# Altium PCB ap-pam-v3_2.PcbDoc
Units mm, origin at the board's own origin, x right, y up, seen from the top; angles counter-clockwise.
Board outline 190.5 x 50.8 mm, 2 copper layers (Top Layer, Bottom Layer), stack 0.579 mm thick; 8 components, 4 nets, 92 pads, 1167 vias.
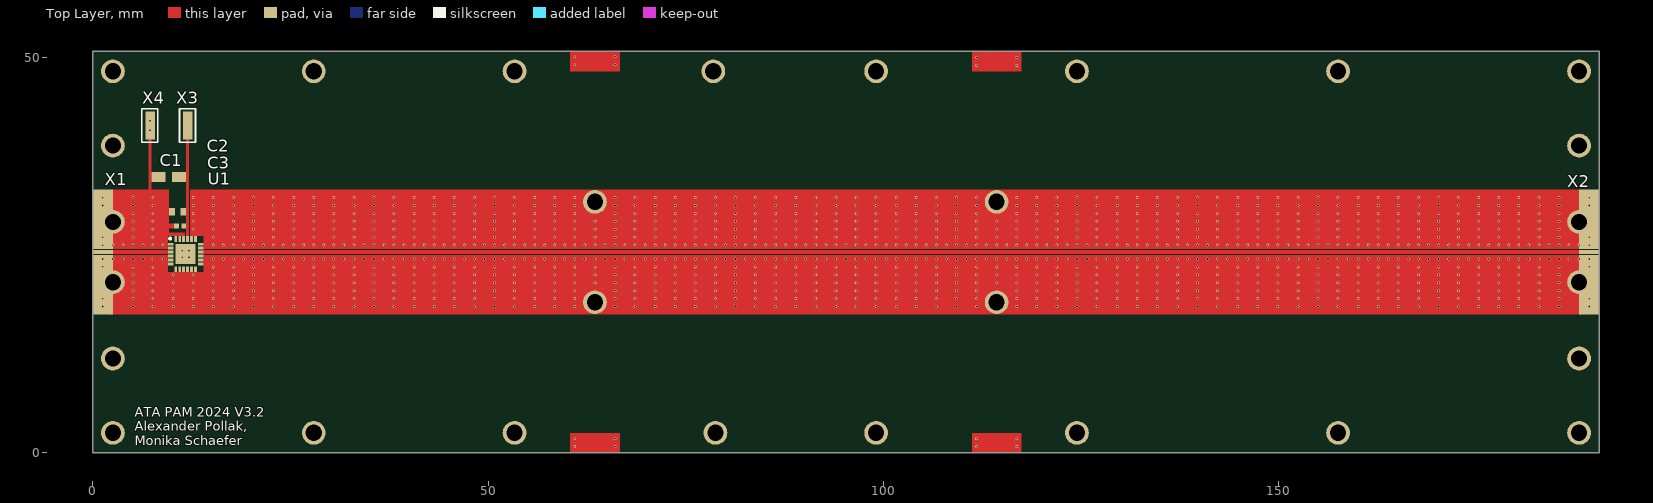
[diagram p0: Top Layer view]
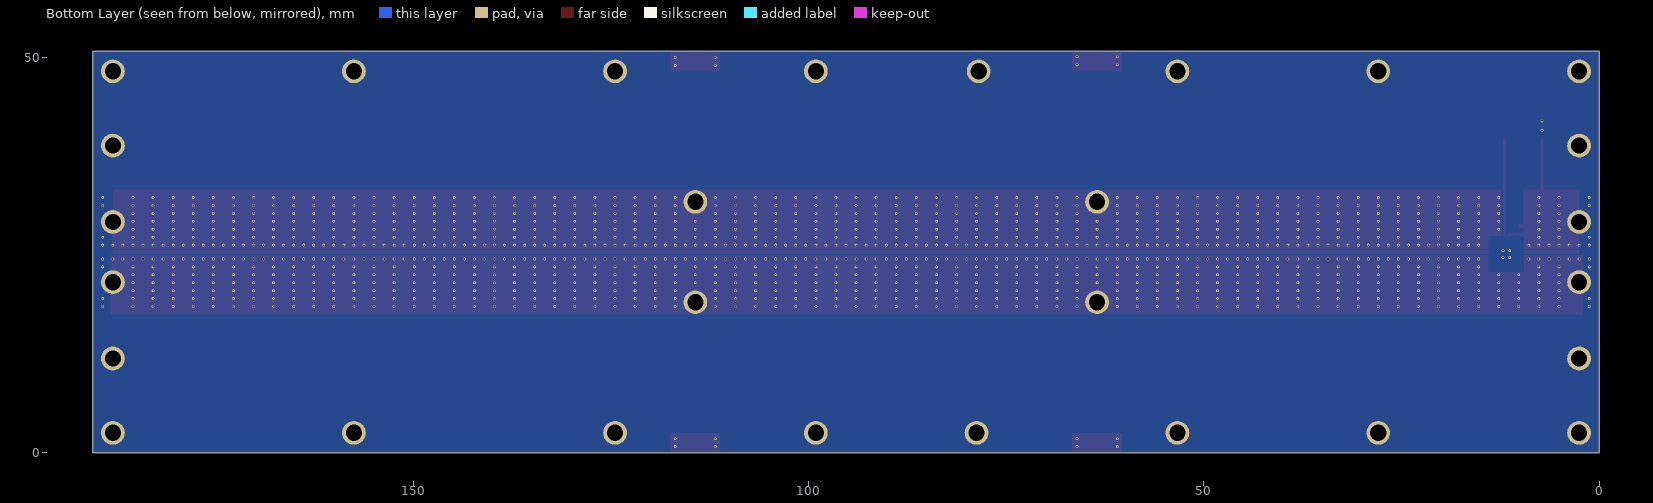
[diagram p1: Bottom Layer view, seen from below]
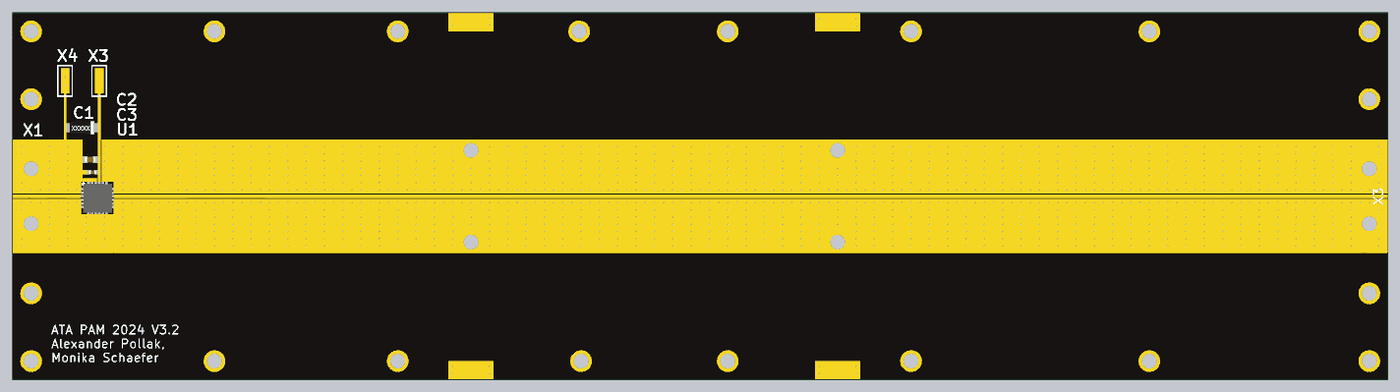
[diagram p2: 3D render of the assembled board from above, using the file's embedded part models]

## Layer stack, top to bottom
Top Layer: signal copper 0.0356
Dielectric 1: dielectric 0.508, Rogers 4350B, Dk 3.48
Bottom Layer: signal copper 0.0356

## Board outline
0,0 190.5,0 190.5,50.8 0,50.8

## Design rules (kind name [scope] priority, off if disabled: settings)
Clearance [All] p1: gap=0.1 ignorepadtopadclearanceinfootprint=FALSE
HoleSize [All] p1: absolutevalues=TRUE maxlimit=2.54 minlimit=0.2 maxpercent=80.000 minpercent=20.000
MinimumSolderMaskSliver [All] p1: minsoldermaskwidth=0.1
PolygonConnect [All] p1: connectstyle=Direct reliefconductorwidth=0.254 reliefentries=4 polygonreliefangle="90 Angle" airgapwidth=0.254
RoutingVias [All] p1: holewidth=0.711 width=1.27 viastyle="Through Hole" minholewidth=0.2 minwidth=0.35 maxholewidth=0.711 maxwidth=1.27
SilkToSolderMaskClearance [IsPad] p1: minsilkscreentomaskgap=0.15 clearancetoexposedcopper=TRUE
SolderMaskExpansion [All] p1: expansion=0.102 istentingtop=FALSE
SupplyNets "Schematic Supply Nets" [InNet('GND')] p1: voltage=0.000
Width [All] p1: maxlimit=0.254 minlimit=0.254 preferedwidth=0.254
27 further rules are at their usual default settings.

## Components (designator, comment, footprint, x,y, rotation, side; value= is the part's Value field where it differs from the comment)
C1 "4.7 uF" C4_7UF 9.611,34.908 r180 top value=4.7uF
C2 "1000 pF" C1000PF 10.736,30.49 r0 top value=1nF
C3 "100 pF" C100PF 11.051,28.71 r0 top
U1 "MML098Q4A" MML098Q4A 11.735,25.15 r0 top
X1 "CPW Solder Pad" "CPW EDGE CONNECTOR" 1.27,25.4 r90 top (schematic designator X4)
X2 "CPW Solder Pad" "CPW EDGE CONNECTOR" 189.23,25.4 r90 top (schematic designator X3)
X3 "Solder Pad" "SOLDER PAD" 11.985,41.398 r0 top
X4 "Solder Pad" "SOLDER PAD" 7.236,41.398 r0 top

## Footprints (in the part's own frame and the unit in brackets; to place one, negate y for a bottom-side part, rotate by r counter-clockwise, add the part's x,y. Pads: shape width x height; smd on the part's side, far side on the other; paste and mask are expansions set on the pad)
C4_7UF [mm]
  rect 1.8x1.25 smd: 1(-1.3,0) 2(1.3,0)
  body extent -1.7,-0.95 1.7,0.95, height 1.84
C100PF [mm]
  rect 0.6x0.62 smd: 1(-0.46,0) 2(0.461,0)
  body extent -0.5,-0.25 0.5,0.25, height 0.55
C1000PF [mm]
  rect 0.75x0.94 smd: 1(-0.7,0) 2(0.7,0)
  body extent -0.8,-0.4 0.8,0.4, height 0.9
"CPW EDGE CONNECTOR" [mm]
  rect 0.538x2.54 smd paste-2539.97: 1(0,0)
  rect 7.5x2.54 smd paste-2539.97: 2(-4.133,0) 3(4.133,0)
MML098Q4A [mm]
  rect 0.7x0.35 smd: 1(-1.9,1.25) 2(-1.9,0.75) 3(-1.9,0.25) 4(-1.9,-0.25) 5(-1.9,-0.75) 6(-1.9,-1.25) 13(1.9,-1.25) 14(1.9,-0.75) 15(1.9,-0.25) 16(1.9,0.25) 17(1.9,0.75) 18(1.9,1.25)
  rect 0.7x0.35 on Top Paste: 1(-1.9,1.25) 2(-1.9,0.75) 3(-1.9,0.25) 4(-1.9,-0.25) 5(-1.9,-0.75) 6(-1.9,-1.25) 13(1.9,-1.25) 14(1.9,-0.75) 15(1.9,-0.25) 16(1.9,0.25) 17(1.9,0.75) 18(1.9,1.25)
  rect 0.35x0.7 smd: 7(-1.25,-1.9) 8(-0.75,-1.9) 9(-0.25,-1.9) 10(0.25,-1.9) 11(0.75,-1.9) 12(1.25,-1.9) 19(1.25,1.9) 20(0.75,1.9) 21(0.25,1.9) 22(-0.25,1.9) 23(-0.75,1.9) 24(-1.25,1.9)
  rect 0.35x0.7 on Top Paste: 7(-1.25,-1.9) 8(-0.75,-1.9) 9(-0.25,-1.9) 10(0.25,-1.9) 11(0.75,-1.9) 12(1.25,-1.9) 19(1.25,1.9) 20(0.75,1.9) 21(0.25,1.9) 22(-0.25,1.9) 23(-0.75,1.9) 24(-1.25,1.9)
  rect 2.55x2.55 smd: 25(0,0)
  rect 2.5x2.5 on Top Paste: 25(0,0)
  silkscreen extent -2.07,1.83 -1.83,2.07, body extent -2.05,-2.05 2.05,2.05, height 1.05
"SOLDER PAD" [mm]
  rect 1.2x3.5 smd paste-2539.97: 1(0,0)
  silkscreen extent -1.02,-2.12 1,2.12

## Part data
C1: library part TH3A475K010C2900, "Tantalum Capacitor, Polarized, Tantalum (dry/solid), 10V, 10% +Tol, 10% -Tol, 4.7uF, Surface Mount, 1306", Capacitor Type=Tantalum, Case/Package=1206, ESR (Equivalent Series Resistance)=2.9R, Leakage Current=500nA, Manufacturer="Vishay Sprague", Max Operating Temperature=150°C, Min Operating Temperature=-55°C, Package Shape=Rectangular, Package Style=SMTMeter, Rated DC Voltage (URdc)=10V, Ripple Current=160mA, Supplier Part Number=4924098, Tolerance  (fill in as +-)=10%, Category="Tantalum Capacitors", ComponentLink1Description=https://datasheet.ciiva.com:443/pdfs/VipMasterIC/IC/VISH/VISH-S-A0010085390/VISH-S-A0010085390-1.pdf?src-supplier=IHS+Markit, ComponentLink1URL=https://datasheet.ciiva.com:443/pdfs/VipMasterIC/IC/VISH/VISH-S-A0010085390/VISH-S-A0010085390-1.pdf?src-supplier=IHS+Markit, ComponentLink2Description=https://datasheet.ciiva.com/268/th3-268785.pdf?src-supplier=Digikey, ComponentLink2URL=https://datasheet.ciiva.com/268/th3-268785.pdf?src-supplier=Digikey, ComponentLink3Description=https://datasheet.ciiva.com/16360/th3-16360891.pdf?src-supplier=Future+Electronics, ComponentLink3URL=https://datasheet.ciiva.com/16360/th3-16360891.pdf?src-supplier=Future+Electronics, Dielectric Material=Tantalum, Height=1.6mm, JESD-609 Code=e3, Length=3.2mm, Manufacturer Part Number=TH3A475K010C2900, Mounting Technology="Surface Mount", Packaging="Tape and Reel", Pins=2, Polarity=Polarized, Pricing="2000=0.178, 4000=0.175, 6000=0.173, 8000=0.171, 10000=0.166 (USD)", Reach SVHC Compliant=Yes, Reference Standard=AEC-Q200, RoHS=Yes, RoHS Compliant=Yes, Stock=2000, Supplier="Future Electronics", Tan Delta=0.06, Terminal Finish=Tin, Termination="J BEND", Tolerance (fill in as +-)=10%, Width=1.6mm
C2: library part GCM1885C1H102FA16D, "Ceramic Capacitor, Multilayer, Ceramic, 50V, 1% +Tol, 1% -Tol, C0G, 30ppm/Cel TC, 0.001uF, Surface Mount, 0603", Capacitor Type=Ceramic, Case/Package=0603, Manufacturer=Murata, Max Operating Temperature=125°C, Min Operating Temperature=-55°C, Package Shape=Rectangular, Rated DC Voltage (URdc)=50V, Supplier Part Number=81-GCM1885C1H102FA6D, Temperature Characteristics Code=C0G, Tolerance  (fill in as +-)=1%, Category="Ceramic Capacitors", ComponentLink1Description=https://datasheet.ciiva.com:443/pdfs/VipMasterIC/IC/MURE/MURE-S-A0004370842/MURE-S-A0004372260-1.pdf?src-supplier=IHS+Markit, ComponentLink1URL=https://datasheet.ciiva.com:443/pdfs/VipMasterIC/IC/MURE/MURE-S-A0004370842/MURE-S-A0004372260-1.pdf?src-supplier=IHS+Markit, Dielectric Material=Ceramic, Manufacturer Part Number=GCM1885C1H102FA16D, Mounting Technology="Surface Mount", Multilayer=Yes, Packaging="Tape and Reel", Pins=2, Pricing="1=0.35, 10=0.229, 50=0.229, 100=0.138, 1000=0.092, 10000=0.074 (USD)", Reach SVHC Compliant=Yes, Reference Standard=AEC-Q200, RoHS=Yes, RoHS Compliant=Yes, Stock=27229, Supplier=Mouser, Termination=Wraparound, Tolerance (fill in as +-)=1%
C3: library part GRM1555C2A101FA01D, "Multilayer Ceramic Capacitors MLCC - SMD/SMT 100 pF 100 VDC 1% 0402 C0G (NP0)", Manufacturer=Murata, Supplier Part Number=81-GRM1555C2A11FA1D, Manufacturer Part Number=GRM1555C2A101FA01D, Pricing="1=0.18, 10=0.119, 50=0.119, 100=0.06, 1000=0.039, 10000=0.035 (USD)", RoHS=No, Stock=21646, Supplier=Mouser
U1: "Low Noise Amplifier / Low current consumption / Low noise figure / Pb-free RoHS compliant QFN package / Ultra wideband performance / Positive bias / Ready for Space Qualification", Current (mA)=55, Frequency (GHz)=0.10-20.00, Voltage (VDC)=5.0, Gain (dB)=23.00, Noise Figure (dB)=2.2, Output P1dB (dBm)=12.00, Part Number=MML098Q4A
X1 X2: library part "RF  CPW Solder Pad", "Solder pad for RF Coplanar Waveguide Rogers 4350B Thickness 0.020\" Copper 1oz"
X3 X4: "Pad to solder wires to"

## Free pads (board coordinates)
  round 3 hole 2.05 mask-2539.97: 1(2.54,2.54) 2(27.94,2.54) 3(53.34,2.54) 4(78.74,2.54) 5(99.06,2.54) 6(124.46,2.54) 7(157.48,2.54) 8(187.96,2.54) 9(187.96,48.26) 10(157.48,48.26) 11(124.46,48.26) 12(99.06,48.26) 13(78.47,48.26) 14(53.34,48.26) 15(27.94,48.26) 16(2.54,48.26) 17(2.54,38.862) 18(2.54,29.21) 19(2.54,21.59) 20(2.54,11.938) 21(187.96,38.862) 22(187.96,29.21) 23(187.96,21.59) 24(187.96,11.938) 25(63.5,31.75) 26(114.3,31.75) 27(114.3,19.05) 28(63.5,19.05)

## Via types
v1: diameter 0.35, hole 0.2, Top Layer to Bottom Layer, 1167 vias

## Nets (pads, with @x,y where several pads share a name; then routed paths per layer and width w, separated by ;. In a path a pad name is that pad's centre, name@x,y a point inside that pad or via, vN(x,y) a via of type N, cw(c..) or ccw(c..) an arc to the next point about the centre after c; other vN are vias at no path point)
+5V: C1.1 C2.2 C3.2 U1.21@11.985,27.05 X3.1
GND: C1.2 C2.1 C3.1 pad.1 pad.2 pad.3 pad.4 pad.5 pad.6 pad.7 pad.8 pad.9 pad.10 pad.11 pad.12 pad.13 pad.14 pad.15 pad.16 pad.17 pad.18 pad.19 pad.20 pad.21 pad.22 pad.23 pad.24 pad.25 pad.26 pad.27 pad.28 U1.1@9.835,26.4 U1.2@9.835,25.9 U1.4@9.835,24.9 U1.5@9.835,24.4 U1.6@9.835,23.9 U1.7@10.485,23.25 U1.8@10.985,23.25 U1.9@11.485,23.25 U1.10@11.985,23.25 U1.11@12.485,23.25 U1.12@12.985,23.25 U1.13@13.635,23.9 U1.14@13.635,24.4 U1.15@13.635,24.9 U1.17@13.635,25.9 U1.18@13.635,26.4 U1.19@12.985,27.05 U1.20@12.485,27.05 U1.22@11.485,27.05 U1.23@10.985,27.05 U1.24@10.485,27.05 U1.25@11.735,25.15 X1.2 X1.3 X2.2 X2.3 X4.1 | length 0.4
  Top Layer w0.254: 22.86,30.6 22.925,30.665 22.925,30.975 22.9,30.95
  other v1: 60.96,0.8 66.04,0.8 111.76,0.8 116.84,0.8 60.96,1.8 66.04,1.8 111.76,1.8 116.84,1.8 1.27,18.517 5.08,18.517 7.62,18.517 10.16,18.517 12.7,18.517 15.24,18.517 17.78,18.517 20.32,18.517 22.86,18.517 25.4,18.517 27.94,18.517 30.48,18.517 33.02,18.517 35.56,18.517 38.1,18.517 40.64,18.517 43.18,18.517 45.72,18.517 48.26,18.517 50.8,18.517 53.34,18.517 55.88,18.517 58.42,18.517 60.96,18.517 66.04,18.517 68.58,18.517 71.12,18.517 73.66,18.517 76.2,18.517 78.74,18.517 81.28,18.517 83.82,18.517 86.36,18.517 88.9,18.517 91.44,18.517 93.98,18.517 96.52,18.517 99.06,18.517 101.6,18.517 104.14,18.517 106.68,18.517 109.22,18.517 111.76,18.517 116.84,18.517 119.38,18.517 121.92,18.517 124.46,18.517 127,18.517 129.54,18.517 132.08,18.517 134.62,18.517 137.16,18.517 139.7,18.517 142.24,18.517 144.78,18.517 147.32,18.517 149.86,18.517 152.4,18.517 154.94,18.517 157.48,18.517 160.02,18.517 162.56,18.517 165.1,18.517 167.64,18.517 170.18,18.517 172.72,18.517 175.26,18.517 177.8,18.517 180.34,18.517 182.88,18.517 185.42,18.517 189.23,18.517 1.27,19.517 5.08,19.517 7.62,19.517 10.16,19.517 12.7,19.517 15.24,19.517 17.78,19.517 20.32,19.517 22.86,19.517 25.4,19.517 27.94,19.517 30.48,19.517 33.02,19.517 35.56,19.517 38.1,19.517 40.64,19.517 43.18,19.517 45.72,19.517 48.26,19.517 50.8,19.517 53.34,19.517 55.88,19.517 58.42,19.517 60.96,19.517 66.04,19.517 68.58,19.517 71.12,19.517 73.66,19.517 76.2,19.517 78.74,19.517 81.28,19.517 83.82,19.517 86.36,19.517 88.9,19.517 91.44,19.517 93.98,19.517 96.52,19.517 99.06,19.517 101.6,19.517 104.14,19.517 106.68,19.517 109.22,19.517 111.76,19.517 116.84,19.517 119.38,19.517 121.92,19.517 124.46,19.517 127,19.517 129.54,19.517 132.08,19.517 134.62,19.517 137.16,19.517 139.7,19.517 142.24,19.517 144.78,19.517 147.32,19.517 149.86,19.517 152.4,19.517 154.94,19.517 157.48,19.517 160.02,19.517 162.56,19.517 165.1,19.517 167.64,19.517 170.18,19.517 172.72,19.517 175.26,19.517 177.8,19.517 180.34,19.517 182.88,19.517 185.42,19.517 189.23,19.517 5.08,20.517 7.62,20.517 10.16,20.517 12.7,20.517 15.24,20.517 17.78,20.517 20.32,20.517 22.86,20.517 25.4,20.517 27.94,20.517 30.48,20.517 33.02,20.517 35.56,20.517 38.1,20.517 40.64,20.517 43.18,20.517 45.72,20.517 48.26,20.517 50.8,20.517 53.34,20.517 55.88,20.517 58.42,20.517 60.96,20.517 66.04,20.517 68.58,20.517 71.12,20.517 73.66,20.517 76.2,20.517 78.74,20.517 81.28,20.517 83.82,20.517 86.36,20.517 88.9,20.517 91.44,20.517 93.98,20.517 96.52,20.517 99.06,20.517 101.6,20.517 104.14,20.517 106.68,20.517 109.22,20.517 111.76,20.517 116.84,20.517 119.38,20.517 121.92,20.517 124.46,20.517 127,20.517 129.54,20.517 132.08,20.517 134.62,20.517 137.16,20.517 139.7,20.517 142.24,20.517 144.78,20.517 147.32,20.517 149.86,20.517 152.4,20.517 154.94,20.517 157.48,20.517 160.02,20.517 162.56,20.517 165.1,20.517 167.64,20.517 170.18,20.517 172.72,20.517 175.26,20.517 177.8,20.517 180.34,20.517 182.88,20.517 185.42,20.517 5.08,21.517 7.62,21.517 10.16,21.517 12.7,21.517 15.24,21.517 17.78,21.517 20.32,21.517 22.86,21.517 25.4,21.517 27.94,21.517 30.48,21.517 33.02,21.517 35.56,21.517 38.1,21.517 40.64,21.517 43.18,21.517 45.72,21.517 48.26,21.517 50.8,21.517 53.34,21.517 55.88,21.517 58.42,21.517 60.96,21.517 63.5,21.517 66.04,21.517 68.58,21.517 71.12,21.517 73.66,21.517 76.2,21.517 78.74,21.517 81.28,21.517 83.82,21.517 86.36,21.517 88.9,21.517 91.44,21.517 93.98,21.517 96.52,21.517 99.06,21.517 101.6,21.517 104.14,21.517 106.68,21.517 109.22,21.517 111.76,21.517 114.3,21.517 116.84,21.517 119.38,21.517 121.92,21.517 124.46,21.517 127,21.517 129.54,21.517 132.08,21.517 134.62,21.517 137.16,21.517 139.7,21.517 142.24,21.517 144.78,21.517 147.32,21.517 149.86,21.517 152.4,21.517 154.94,21.517 157.48,21.517 160.02,21.517 162.56,21.517 165.1,21.517 167.64,21.517 170.18,21.517 172.72,21.517 175.26,21.517 177.8,21.517 180.34,21.517 182.88,21.517 185.42,21.517 5.08,22.517 7.62,22.517 10.16,22.517 12.7,22.517 15.24,22.517 17.78,22.517 20.32,22.517 22.86,22.517 25.4,22.517 27.94,22.517 30.48,22.517 33.02,22.517 35.56,22.517 38.1,22.517 40.64,22.517 43.18,22.517 45.72,22.517 48.26,22.517 50.8,22.517 53.34,22.517 55.88,22.517 58.42,22.517 60.96,22.517 63.5,22.517 66.04,22.517 68.58,22.517 71.12,22.517 73.66,22.517 76.2,22.517 78.74,22.517 81.28,22.517 83.82,22.517 86.36,22.517 88.9,22.517 91.44,22.517 93.98,22.517 96.52,22.517 99.06,22.517 101.6,22.517 104.14,22.517 106.68,22.517 109.22,22.517 111.76,22.517 114.3,22.517 116.84,22.517 119.38,22.517 121.92,22.517 124.46,22.517 127,22.517 129.54,22.517 132.08,22.517 134.62,22.517 137.16,22.517 139.7,22.517 142.24,22.517 144.78,22.517 147.32,22.517 149.86,22.517 152.4,22.517 154.94,22.517 157.48,22.517 160.02,22.517 162.56,22.517 165.1,22.517 167.64,22.517 170.18,22.517 172.72,22.517 175.26,22.517 177.8,22.517 180.34,22.517 182.88,22.517 185.42,22.517 1.27,23.517 5.08,23.517 7.62,23.517 15.24,23.517 17.78,23.517 20.32,23.517 22.86,23.517 25.4,23.517 27.94,23.517 30.48,23.517 33.02,23.517 35.56,23.517 38.1,23.517 40.64,23.517 43.18,23.517 45.72,23.517 48.26,23.517 50.8,23.517 53.34,23.517 55.88,23.517 58.42,23.517 60.96,23.517 63.5,23.517 66.04,23.517 68.58,23.517 71.12,23.517 73.66,23.517 76.2,23.517 78.74,23.517 81.28,23.517 83.82,23.517 86.36,23.517 88.9,23.517 91.44,23.517 93.98,23.517 96.52,23.517 99.06,23.517 101.6,23.517 104.14,23.517 106.68,23.517 109.22,23.517 111.76,23.517 114.3,23.517 116.84,23.517 119.38,23.517 121.92,23.517 124.46,23.517 127,23.517 129.54,23.517 132.08,23.517 134.62,23.517 137.16,23.517 139.7,23.517 142.24,23.517 144.78,23.517 147.32,23.517 149.86,23.517 152.4,23.517 154.94,23.517 157.48,23.517 160.02,23.517 162.56,23.517 165.1,23.517 167.64,23.517 170.18,23.517 172.72,23.517 175.26,23.517 177.8,23.517 180.34,23.517 182.88,23.517 185.42,23.517 189.23,23.517 1.27,24.517 2.54,24.517 3.81,24.517 5.08,24.517 6.35,24.517 7.62,24.517 8.89,24.517 15.24,24.517 16.51,24.517 17.78,24.517 19.05,24.517 20.32,24.517 21.59,24.517 22.86,24.517 24.13,24.517 25.4,24.517 26.67,24.517 27.94,24.517 29.21,24.517 30.48,24.517 31.75,24.517 33.02,24.517 34.29,24.517 35.56,24.517 36.83,24.517 38.1,24.517 39.37,24.517 40.64,24.517 41.91,24.517 43.18,24.517 44.45,24.517 45.72,24.517 46.99,24.517 48.26,24.517 49.53,24.517 50.8,24.517 52.07,24.517 53.34,24.517 54.61,24.517 55.88,24.517 57.15,24.517 58.42,24.517 59.69,24.517 60.96,24.517 62.23,24.517 63.5,24.517 64.77,24.517 66.04,24.517 67.31,24.517 68.58,24.517 69.85,24.517 71.12,24.517 72.39,24.517 73.66,24.517 74.93,24.517 76.2,24.517 77.47,24.517 78.74,24.517 80.01,24.517 81.28,24.517 82.55,24.517 83.82,24.517 85.09,24.517 86.36,24.517 87.63,24.517 88.9,24.517 90.17,24.517 91.44,24.517 92.71,24.517 93.98,24.517 95.25,24.517 96.52,24.517 97.79,24.517 99.06,24.517 100.33,24.517 101.6,24.517 102.87,24.517 104.14,24.517 105.41,24.517 106.68,24.517 107.95,24.517 109.22,24.517 110.49,24.517 111.76,24.517 113.03,24.517 114.3,24.517 115.57,24.517 116.84,24.517 118.11,24.517 119.38,24.517 120.65,24.517 121.92,24.517 123.19,24.517 124.46,24.517 125.73,24.517 127,24.517 128.27,24.517 129.54,24.517 130.81,24.517 132.08,24.517 133.35,24.517 134.62,24.517 135.89,24.517 137.16,24.517 138.43,24.517 139.7,24.517 140.97,24.517 142.24,24.517 143.51,24.517 144.78,24.517 146.05,24.517 147.32,24.517 148.59,24.517 149.86,24.517 151.13,24.517 152.4,24.517 153.67,24.517 154.94,24.517 156.21,24.517 157.48,24.517 158.75,24.517 160.02,24.517 161.29,24.517 162.56,24.517 163.83,24.517 165.1,24.517 166.37,24.517 167.64,24.517 168.91,24.517 170.18,24.517 171.45,24.517 172.72,24.517 173.99,24.517 175.26,24.517 176.53,24.517 177.8,24.517 179.07,24.517 180.34,24.517 181.61,24.517 182.88,24.517 184.15,24.517 185.42,24.517 186.69,24.517 187.96,24.517 189.23,24.517 11.31,24.725 12.16,24.725 11.31,25.575 12.16,25.575 1.27,26.283 2.54,26.283 3.81,26.283 5.08,26.283 6.35,26.283 7.62,26.283 8.89,26.283 15.24,26.283 16.51,26.283 17.78,26.283 19.05,26.283 20.32,26.283 21.59,26.283 22.86,26.283 24.13,26.283 25.4,26.283 26.67,26.283 27.94,26.283 29.21,26.283 30.48,26.283 31.75,26.283 33.02,26.283 34.29,26.283 35.56,26.283 36.83,26.283 38.1,26.283 39.37,26.283 40.64,26.283 41.91,26.283 43.18,26.283 44.45,26.283 45.72,26.283 46.99,26.283 48.26,26.283 49.53,26.283 50.8,26.283 52.07,26.283 53.34,26.283 54.61,26.283 55.88,26.283 57.15,26.283 58.42,26.283 59.69,26.283 60.96,26.283 62.23,26.283 63.5,26.283 64.77,26.283 66.04,26.283 67.31,26.283 68.58,26.283 69.85,26.283 71.12,26.283 72.39,26.283 73.66,26.283 74.93,26.283 76.2,26.283 77.47,26.283 78.74,26.283 80.01,26.283 81.28,26.283 82.55,26.283 83.82,26.283 85.09,26.283 86.36,26.283 87.63,26.283 88.9,26.283 90.17,26.283 91.44,26.283 92.71,26.283 93.98,26.283 95.25,26.283 96.52,26.283 97.79,26.283 99.06,26.283 100.33,26.283 101.6,26.283 102.87,26.283 104.14,26.283 105.41,26.283 106.68,26.283 107.95,26.283 109.22,26.283 110.49,26.283 111.76,26.283 113.03,26.283 114.3,26.283 115.57,26.283 116.84,26.283 118.11,26.283 119.38,26.283 120.65,26.283 121.92,26.283 123.19,26.283 124.46,26.283 125.73,26.283 127,26.283 128.27,26.283 129.54,26.283 130.81,26.283 132.08,26.283 133.35,26.283 134.62,26.283 135.89,26.283 137.16,26.283 138.43,26.283 139.7,26.283 140.97,26.283 142.24,26.283 143.51,26.283 144.78,26.283 146.05,26.283 147.32,26.283 148.59,26.283 149.86,26.283 151.13,26.283 152.4,26.283 153.67,26.283 154.94,26.283 156.21,26.283 157.48,26.283 158.75,26.283 160.02,26.283 161.29,26.283 162.56,26.283 163.83,26.283 165.1,26.283 166.37,26.283 167.64,26.283 168.91,26.283 170.18,26.283 171.45,26.283 172.72,26.283 173.99,26.283 175.26,26.283 176.53,26.283 177.8,26.283 179.07,26.283 180.34,26.283 181.61,26.283 182.88,26.283 184.15,26.283 185.42,26.283 186.69,26.283 187.96,26.283 189.23,26.283 1.27,27.283 5.08,27.283 7.62,27.283 15.24,27.283 17.78,27.283 20.32,27.283 22.86,27.283 25.4,27.283 27.94,27.283 30.48,27.283 33.02,27.283 35.56,27.283 38.1,27.283 40.64,27.283 43.18,27.283 45.72,27.283 48.26,27.283 50.8,27.283 53.34,27.283 55.88,27.283 58.42,27.283 60.96,27.283 63.5,27.283 66.04,27.283 68.58,27.283 71.12,27.283 73.66,27.283 76.2,27.283 78.74,27.283 81.28,27.283 83.82,27.283 86.36,27.283 88.9,27.283 91.44,27.283 93.98,27.283 96.52,27.283 99.06,27.283 101.6,27.283 104.14,27.283 106.68,27.283 109.22,27.283 111.76,27.283 114.3,27.283 116.84,27.283 119.38,27.283 121.92,27.283 124.46,27.283 127,27.283 129.54,27.283 132.08,27.283 134.62,27.283 137.16,27.283 139.7,27.283 142.24,27.283 144.78,27.283 147.32,27.283 149.86,27.283 152.4,27.283 154.94,27.283 157.48,27.283 160.02,27.283 162.56,27.283 165.1,27.283 167.64,27.283 170.18,27.283 172.72,27.283 175.26,27.283 177.8,27.283 180.34,27.283 182.88,27.283 185.42,27.283 189.23,27.283 5.08,28.283 7.62,28.283 12.7,28.283 15.24,28.283 17.78,28.283 20.32,28.283 22.86,28.283 25.4,28.283 27.94,28.283 30.48,28.283 33.02,28.283 35.56,28.283 38.1,28.283 40.64,28.283 43.18,28.283 45.72,28.283 48.26,28.283 50.8,28.283 53.34,28.283 55.88,28.283 58.42,28.283 60.96,28.283 63.5,28.283 66.04,28.283 68.58,28.283 71.12,28.283 73.66,28.283 76.2,28.283 78.74,28.283 81.28,28.283 83.82,28.283 86.36,28.283 88.9,28.283 91.44,28.283 93.98,28.283 96.52,28.283 99.06,28.283 101.6,28.283 104.14,28.283 106.68,28.283 109.22,28.283 111.76,28.283 114.3,28.283 116.84,28.283 119.38,28.283 121.92,28.283 124.46,28.283 127,28.283 129.54,28.283 132.08,28.283 134.62,28.283 137.16,28.283 139.7,28.283 142.24,28.283 144.78,28.283 147.32,28.283 149.86,28.283 152.4,28.283 154.94,28.283 157.48,28.283 160.02,28.283 162.56,28.283 165.1,28.283 167.64,28.283 170.18,28.283 172.72,28.283 175.26,28.283 177.8,28.283 180.34,28.283 182.88,28.283 185.42,28.283 5.08,29.283 7.62,29.283 12.7,29.283 15.24,29.283 17.78,29.283 20.32,29.283 22.86,29.283 25.4,29.283 27.94,29.283 30.48,29.283 33.02,29.283 35.56,29.283 38.1,29.283 40.64,29.283 43.18,29.283 45.72,29.283 48.26,29.283 50.8,29.283 53.34,29.283 55.88,29.283 58.42,29.283 60.96,29.283 63.5,29.283 66.04,29.283 68.58,29.283 71.12,29.283 73.66,29.283 76.2,29.283 78.74,29.283 81.28,29.283 83.82,29.283 86.36,29.283 88.9,29.283 91.44,29.283 93.98,29.283 96.52,29.283 99.06,29.283 101.6,29.283 104.14,29.283 106.68,29.283 109.22,29.283 111.76,29.283 114.3,29.283 116.84,29.283 119.38,29.283 121.92,29.283 124.46,29.283 127,29.283 129.54,29.283 132.08,29.283 134.62,29.283 137.16,29.283 139.7,29.283 142.24,29.283 144.78,29.283 147.32,29.283 149.86,29.283 152.4,29.283 154.94,29.283 157.48,29.283 160.02,29.283 162.56,29.283 165.1,29.283 167.64,29.283 170.18,29.283 172.72,29.283 175.26,29.283 177.8,29.283 180.34,29.283 182.88,29.283 185.42,29.283 5.08,30.283 7.62,30.283 12.7,30.283 15.24,30.283 17.78,30.283 20.32,30.283 22.86,30.283 25.4,30.283 27.94,30.283 30.48,30.283 33.02,30.283 35.56,30.283 38.1,30.283 40.64,30.283 43.18,30.283 45.72,30.283 48.26,30.283 50.8,30.283 53.34,30.283 55.88,30.283 58.42,30.283 60.96,30.283 66.04,30.283 68.58,30.283 71.12,30.283 73.66,30.283 76.2,30.283 78.74,30.283 81.28,30.283 83.82,30.283 86.36,30.283 88.9,30.283 91.44,30.283 93.98,30.283 96.52,30.283 99.06,30.283 101.6,30.283 104.14,30.283 106.68,30.283 109.22,30.283 111.76,30.283 116.84,30.283 119.38,30.283 121.92,30.283 124.46,30.283 127,30.283 129.54,30.283 132.08,30.283 134.62,30.283 137.16,30.283 139.7,30.283 142.24,30.283 144.78,30.283 147.32,30.283 149.86,30.283 152.4,30.283 154.94,30.283 157.48,30.283 160.02,30.283 162.56,30.283 165.1,30.283 167.64,30.283 170.18,30.283 172.72,30.283 175.26,30.283 177.8,30.283 180.34,30.283 182.88,30.283 185.42,30.283 1.27,31.283 5.08,31.283 7.62,31.283 12.7,31.283 15.24,31.283 17.78,31.283 20.32,31.283 22.86,31.283 25.4,31.283 27.94,31.283 30.48,31.283 33.02,31.283 35.56,31.283 38.1,31.283 40.64,31.283 43.18,31.283 45.72,31.283 48.26,31.283 50.8,31.283 53.34,31.283 55.88,31.283 58.42,31.283 60.96,31.283 66.04,31.283 68.58,31.283 71.12,31.283 73.66,31.283 76.2,31.283 78.74,31.283 81.28,31.283 83.82,31.283 86.36,31.283 88.9,31.283 91.44,31.283 93.98,31.283 96.52,31.283 99.06,31.283 101.6,31.283 104.14,31.283 106.68,31.283 109.22,31.283 111.76,31.283 116.84,31.283 119.38,31.283 121.92,31.283 124.46,31.283 127,31.283 129.54,31.283 132.08,31.283 134.62,31.283 137.16,31.283 139.7,31.283 142.24,31.283 144.78,31.283 147.32,31.283 149.86,31.283 152.4,31.283 154.94,31.283 157.48,31.283 160.02,31.283 162.56,31.283 165.1,31.283 167.64,31.283 170.18,31.283 172.72,31.283 175.26,31.283 177.8,31.283 180.34,31.283 182.88,31.283 185.42,31.283 189.23,31.283 1.27,32.283 5.08,32.283 7.62,32.283 12.7,32.283 15.24,32.283 17.78,32.283 20.32,32.283 22.86,32.283 25.4,32.283 27.94,32.283 30.48,32.283 33.02,32.283 35.56,32.283 38.1,32.283 40.64,32.283 43.18,32.283 45.72,32.283 48.26,32.283 50.8,32.283 53.34,32.283 55.88,32.283 58.42,32.283 60.96,32.283 66.04,32.283 68.58,32.283 71.12,32.283 73.66,32.283 76.2,32.283 78.74,32.283 81.28,32.283 83.82,32.283 86.36,32.283 88.9,32.283 91.44,32.283 93.98,32.283 96.52,32.283 99.06,32.283 101.6,32.283 104.14,32.283 106.68,32.283 109.22,32.283 111.76,32.283 116.84,32.283 119.38,32.283 121.92,32.283 124.46,32.283 127,32.283 129.54,32.283 132.08,32.283 134.62,32.283 137.16,32.283 139.7,32.283 142.24,32.283 144.78,32.283 147.32,32.283 149.86,32.283 152.4,32.283 154.94,32.283 157.48,32.283 160.02,32.283 162.56,32.283 165.1,32.283 167.64,32.283 170.18,32.283 172.72,32.283 175.26,32.283 177.8,32.283 180.34,32.283 182.88,32.283 185.42,32.283 189.23,32.283 7.236,40.815 7.236,41.981 111.76,49 116.84,49 60.96,49.1 66.04,49.1 111.76,50 116.84,50 60.96,50.1 66.04,50.1
RFin: U1.3@9.835,25.4 X1.1
RFout: U1.16@13.635,25.4 X2.1
pads on no net: U1.1@9.835,26.4 U1.2@9.835,25.9 U1.3@9.835,25.4 U1.4@9.835,24.9 U1.5@9.835,24.4 U1.6@9.835,23.9 U1.7@10.485,23.25 U1.8@10.985,23.25 U1.9@11.485,23.25 U1.10@11.985,23.25 U1.11@12.485,23.25 U1.12@12.985,23.25 U1.13@13.635,23.9 U1.14@13.635,24.4 U1.15@13.635,24.9 U1.16@13.635,25.4 U1.17@13.635,25.9 U1.18@13.635,26.4 U1.19@12.985,27.05 U1.20@12.485,27.05 U1.21@11.985,27.05 U1.22@11.485,27.05 U1.23@10.985,27.05 U1.24@10.485,27.05 U1.25@11.735,25.15

## Polygon pours and split planes (outlines as drawn)
GND on Bottom Layer "GND_L02_P000" (solid, pour order 0): 0,0 190.5,0 190.5,50.8 0,50.8

## Other copper
Top Layer:
  rectangle net GND: 9.659,27.399 11.66,27.9
  rectangle net GND: 7.062,33.283 7.412,39.696
  rectangle net RFout: 14.096,25.131 188.03,25.669
  rectangle net GND: 13.985,25.783 188,33.283
  rectangle net GND: 9.477,27.399 9.662,33.283
  rectangle net GND: 2.529,25.783 9.488,33.283
  rectangle net GND: 9.479,17.516 13.999,22.901
  rectangle net +5V: 11.81,27.38 12.16,39.669
  rectangle net GND: 12.31,27.399 13.989,33.283
  rectangle net GND: 13.981,17.517 188.252,25.017
  rectangle net GND: 2.03,17.517 9.485,25.017
  rectangle net GND: 9.657,28.4 10.291,29.02
  rectangle net RFin: 2.519,25.131 9.375,25.669
  rectangle net GND: 111.16,0 117.44,2.54
  rectangle net GND: 60.36,0 66.64,2.54
  rectangle net GND: 111.16,48.26 117.44,50.8
  rectangle net GND: 60.36,48.26 66.64,50.8
  region net GND: 13.985,25.725 14.058,25.786 13.985,25.786
  region net RFout: 14.096,25.669 13.985,25.575 13.985,25.225 14.096,25.131
  region net GND: 13.985,25.075 14.058,25.014 13.985,25.014
  region net GND: 9.485,25.725 9.413,25.786 9.485,25.786
  region net GND: 9.485,25.075 9.413,25.014 9.485,25.014
  region net RFin: 9.375,25.669 9.485,25.575 9.485,25.225 9.375,25.131

## Silkscreen, mask and mechanical layers (free items; w line width, h text height)
Top Overlay:
  text "ATA PAM 2024 V3.2 / Alexander Pollak, / Monika Schaefer" at 5.275,0.975 h1.2
Top Solder:
  circle w1.5: c114.3,19.05 r0.75
  circle w1.5: c114.3,31.75 r0.75
  circle w1.5: c63.5,19.05 r0.75
  circle w1.5: c187.96,29.21 r0.75
  circle w1.5: c187.96,21.59 r0.75
  circle w1.5: c2.54,21.59 r0.75
  circle w1.5: c63.5,31.75 r0.75
  circle w1.5: c2.54,29.21 r0.75
  circle w1.5: c187.96,11.938 r0.75
  circle w1.5: c187.96,2.54 r0.75
  circle w1.5: c78.47,48.26 r0.75
  circle w1.5: c78.74,2.54 r0.75
  circle w1.5: c27.94,48.26 r0.75
  circle w1.5: c27.94,2.54 r0.75
  circle w1.5: c124.46,2.54 r0.75
  circle w1.5: c124.46,48.26 r0.75
  circle w1.5: c157.48,48.26 r0.75
  circle w1.5: c157.48,2.54 r0.75
  circle w1.5: c2.54,11.938 r0.75
  circle w1.5: c2.54,2.54 r0.75
  circle w1.5: c2.54,48.26 r0.75
  circle w1.5: c2.54,38.862 r0.75
  circle w1.5: c187.96,38.862 r0.75
  circle w1.5: c187.96,48.26 r0.75
  circle w1.5: c99.06,2.54 r0.75
  circle w1.5: c99.06,48.26 r0.75
  circle w1.5: c53.34,2.54 r0.75
  circle w1.5: c53.34,48.26 r0.75
  region: 0,0 190.5,0 190.5,50.8 0,50.8
Bottom Solder:
  circle w1.5: c114.3,19.05 r0.75
  circle w1.5: c114.3,31.75 r0.75
  circle w1.5: c63.5,19.05 r0.75
  circle w1.5: c187.96,29.21 r0.75
  circle w1.5: c187.96,21.59 r0.75
  circle w1.5: c2.54,21.59 r0.75
  circle w1.5: c63.5,31.75 r0.75
  circle w1.5: c2.54,29.21 r0.75
  circle w1.5: c187.96,11.938 r0.75
  circle w1.5: c187.96,2.54 r0.75
  circle w1.5: c78.47,48.26 r0.75
  circle w1.5: c78.74,2.54 r0.75
  circle w1.5: c27.94,48.26 r0.75
  circle w1.5: c27.94,2.54 r0.75
  circle w1.5: c124.46,2.54 r0.75
  circle w1.5: c124.46,48.26 r0.75
  circle w1.5: c157.48,48.26 r0.75
  circle w1.5: c157.48,2.54 r0.75
  circle w1.5: c2.54,11.938 r0.75
  circle w1.5: c2.54,2.54 r0.75
  circle w1.5: c2.54,48.26 r0.75
  circle w1.5: c2.54,38.862 r0.75
  circle w1.5: c187.96,38.862 r0.75
  circle w1.5: c187.96,48.26 r0.75
  circle w1.5: c99.06,2.54 r0.75
  circle w1.5: c99.06,48.26 r0.75
  circle w1.5: c53.34,2.54 r0.75
  circle w1.5: c53.34,48.26 r0.75
  region: 0,0 190.5,0 190.5,50.8 0,50.8
Board:
  the board outline again, w0.2